# Altium PCB PCB.PcbDoc
Units mm, origin at the board's own origin, x right, y up, seen from the top; angles counter-clockwise.
Board outline 96 x 29 mm, 2 copper layers (Top Layer, Bottom Layer); 43 components, 25 nets, 160 pads, 27 vias.
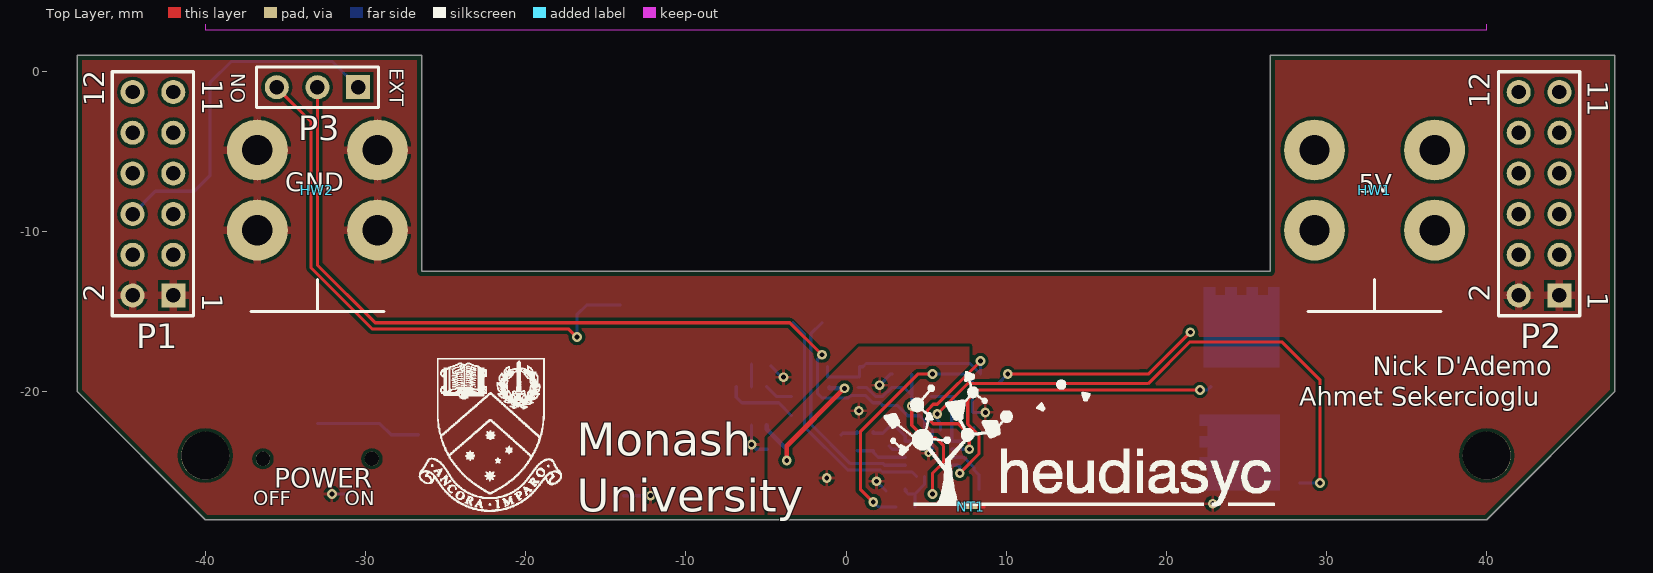
[diagram p0: Top Layer view]
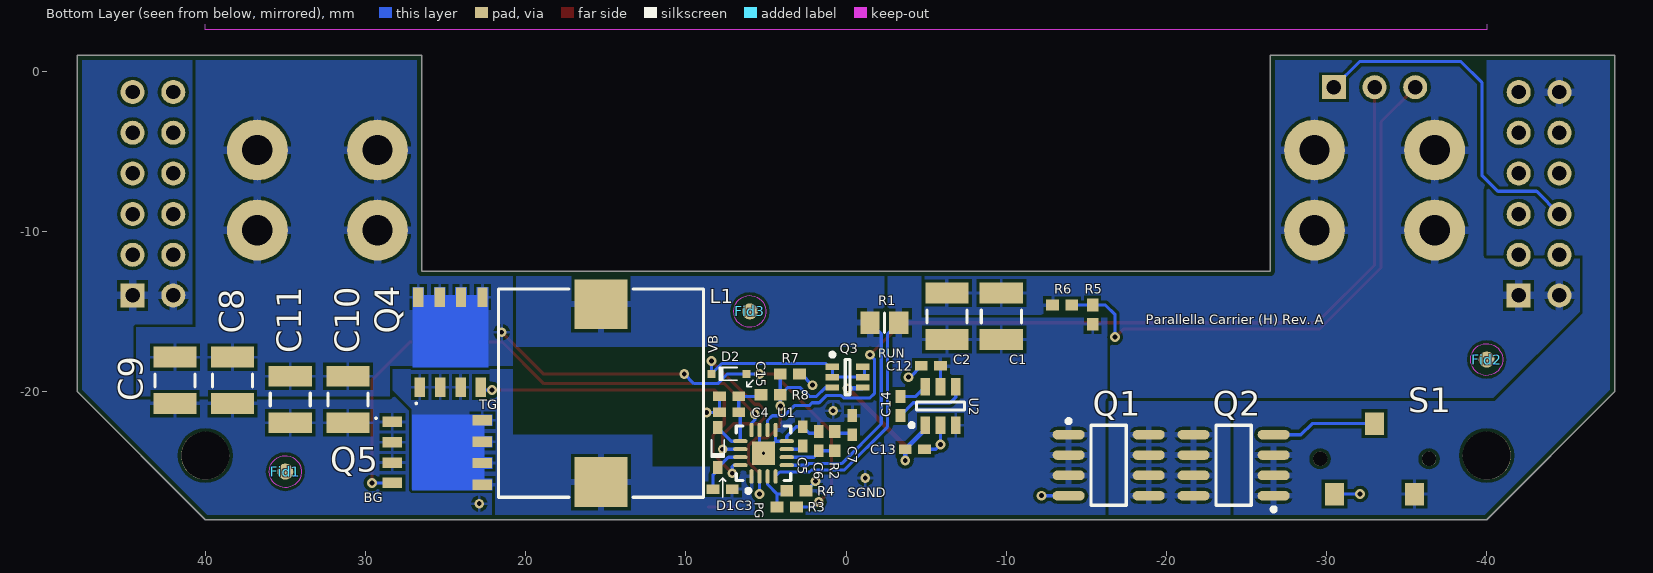
[diagram p1: Bottom Layer view, seen from below]
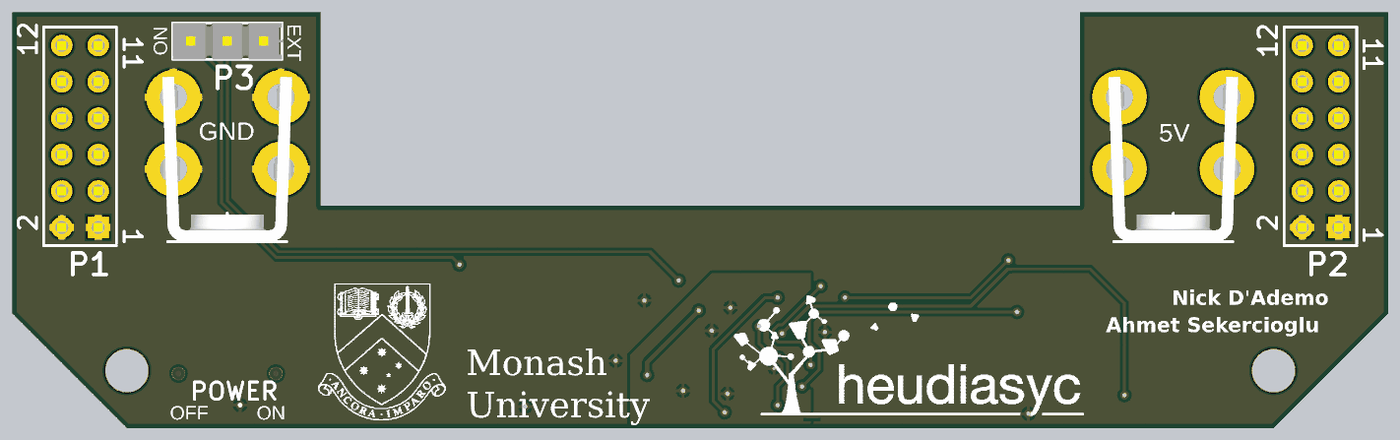
[diagram p2: 3D render of the assembled board from above, using the file's embedded part models]

## Layer stack, top to bottom
Top Solder: solder mask 0.0102, Solder Resist, Dk 3.5
Top Layer: signal copper 0.0356
Dielectric 1: dielectric 0.32, FR-4, Dk 4.8
Bottom Layer: signal copper 0.0356
Bottom Solder: solder mask 0.0102, Solder Resist, Dk 3.5

## Board outline
-48,-20 -40,-28 40,-28 48,-20 48,1 41.6,1 26.5,1 26.5,-12.5 -26.5,-12.5 -26.5,1 -48,1

## Design rules (kind name [scope] priority, off if disabled: settings)
BoardOutlineClearance [IsPolygon] p1: gap=0.3
Clearance [All] p1: gap=0.2
HoleSize [All] p1: absolutevalues=TRUE maxlimit=3 minlimit=0.025 maxpercent=80.000 minpercent=20.000
MinimumSolderMaskSliver [All] p1: minsoldermaskwidth=0
PolygonConnect PolygonConnect_GND [InNet('GND') And (InComponent('P1') Or InComponent('P2') Or InComponent('HW2')) vs InNet('GND')] p1: connectstyle=Relief reliefconductorwidth=0.5 reliefentries=4 polygonreliefangle="90 Angle" airgapwidth=0.2
PolygonConnect PolygonConnect_VBAT [InNet('VBAT') And (InComponent('P1')) vs InNet('VBAT')] p2: connectstyle=Relief reliefconductorwidth=0.5 reliefentries=4 polygonreliefangle="90 Angle" airgapwidth=0.2
PolygonConnect PolygonConnect_5V [InNet('5V') And (InComponent('HW1')) vs InNet('5V')] p3: connectstyle=Relief reliefconductorwidth=0.5 reliefentries=4 polygonreliefangle="90 Angle" airgapwidth=0.2
PolygonConnect PolygonConnect_Q1 [InComponent('Q1')] p4: connectstyle=Relief reliefconductorwidth=0.4 reliefentries=4 polygonreliefangle="90 Angle" airgapwidth=0.2
PolygonConnect PolygonConnect_Q2 [InComponent('Q2')] p5: connectstyle=Relief reliefconductorwidth=0.4 reliefentries=4 polygonreliefangle="90 Angle" airgapwidth=0.2
PolygonConnect PolygonConnect_L1 [InComponent('L1')] p6: connectstyle=Relief reliefconductorwidth=0.4 reliefentries=4 polygonreliefangle="90 Angle" airgapwidth=0.2
PolygonConnect PolygonConnect_R1 [InComponent('R1')] p7: connectstyle=Relief reliefconductorwidth=0.4 reliefentries=4 polygonreliefangle="90 Angle" airgapwidth=0.2
PolygonConnect [All] p8: connectstyle=Relief reliefconductorwidth=0.2 reliefentries=4 polygonreliefangle="90 Angle" airgapwidth=0.2
RoutingVias [All] p1: holewidth=0.711 width=1.27 viastyle="Through Hole" minholewidth=0.711 minwidth=1.27 maxholewidth=0.711 maxwidth=1.27
SilkToSilkClearance [All] p1: silktosilkclearance=0
SilkToSolderMaskClearance [IsPad] p1: minsilkscreentomaskgap=0.1 clearancetoexposedcopper=TRUE
SolderMaskExpansion [All] p1: expansion=0.102
Width [All] p1: maxlimit=1 minlimit=0.2 preferedwidth=0.2
26 further rules are at their usual default settings.

## Components (designator, comment, footprint, x,y, rotation, side; value= is the part's Value field where it differs from the comment)
C1 "Cap" CAPC3225N -9.7,-15.3 r90 bottom
C2 "Cap" CAPC3225N -6.3,-15.3 r90 bottom
C3 "Cap" CAPC1005N 7.7,-26.1 r0 bottom
C4 "Cap" CAPC1005N 7.3,-21.3 r0 bottom
C5 "Cap" CAPC1005N 2.7,-22.8 r270 bottom
C6 "Cap" CAPC1005N 1.7,-23.1 r90 bottom
C7 "Cap" CAPC1005N -0.4,-22.1 r90 bottom
C8 "Cap" CAPC3225N 38.3,-19.3 r270 bottom
C9 "Cap" CAPC3225N 41.9,-19.3 r270 bottom
C10 "Cap" CAPC3225N 31.1,-20.5 r270 bottom
C11 "Cap" CAPC3225N 34.7,-20.5 r270 bottom
C12 "Cap" CAPC1005N -5.3,-18.4 r0 bottom
C13 "Cap" CAPC1005N -4.3,-23.6 r180 bottom
C14 "Cap" CAPC1005N -3.4,-20.9 r270 bottom
C15 "Cap" CAPC1005N 7.3,-20.3 r0 bottom
D1 "BAS140WE6327HTSA1" SOD323 8,-23.5 r90 bottom
D2 "PMEG2005EJ,115" SOD323F 7.3,-18.9 r180 bottom
Fid1 "Fiducial mark" Fiducial_BOTTOM 35,-25 r90 top locked
Fid2 "Fiducial mark" Fiducial_BOTTOM -40,-18 r90 top locked
Fid3 "Fiducial mark" Fiducial_BOTTOM 6,-15 r90 top locked
HW1 "7790" 7790 33,-15 r90 top locked
HW2 "7790" 7790 -33,-15 r90 top locked
L1 "SRP1238A-R68M" SRP1238A 15.3,-20.1 r90 bottom
NT1 "NETTIE1" NETTIE1 7.8,-27.2 r0 top net-tie
P1 "Header 6X2" TSW-106-05-G-D -42,-14 r90 top locked
P2 "Header 6X2" TSW-106-05-G-D 44.54,-14 r90 top locked
P3 "" TSW-103-05-T-S -30.46,-1 r180 top
Q1 "SI4427BDY" SOIC127P600-8AN -16.4,-24.6 r180 bottom
Q2 "SI4427BDY" SOIC127P600-8AN -24.2,-24.6 r0 bottom
Q3 "Si1499DH" SOT363-6N -0.1,-19.1 r180 bottom
Q4 "BSC046N02KS G" INF-PG-TDSON-8-1_V 24.7,-16.9 r180 bottom
Q5 "BSC046N02KS G" INF-PG-TDSON-8-1_V 25.5,-23.8 r270 bottom
R1 "Res1" RESC2012N -2.4,-15.7 r180 bottom
R2 "Res1" RESC1005N 0.7,-23.1 r270 bottom
R3 "Res1" RESC1005N 3.7,-27.2 r0 bottom
R4 "Res1" RESC1005N 3.1,-26.2 r180 bottom
R5 "Res1" RESC1005N -15.4,-15.2 r90 bottom
R6 "Res1" RESC1005N -13.5,-14.6 r0 bottom
R7 "Res1" RESC1005N 3.5,-18.9 r180 bottom
R8 "Res1" RESC1005N 4.7,-20.2 r180 bottom
S1 "SPDT" CL-SB-12B-11T -33,-24.2 r180 bottom
U1 "LTC3786EUD#PBF" LT-UD-16_N 5.15,-23.85 r90 bottom
U2 "LTC1754ES6-5#TRMPBF" LT-S6-6-SOT-23_N -5.9,-20.9 r90 bottom

## Footprints (in the part's own frame and the unit in brackets; to place one, negate y for a bottom-side part, rotate by r counter-clockwise, add the part's x,y. Pads: shape width x height; smd on the part's side, far side on the other; paste and mask are expansions set on the pad)
7790 [mm]
  round 3.8 hole 1.9: 0(5.08,-3.75) 0(5.08,3.75) 0(10.08,-3.75) 0(10.08,3.75)
  silkscreen extent 0,-4.15 2,4.15, body extent 0,-4.83 11.51,4.83, height 7.92
CAPC1005N [mm] "Chip Capacitor, Body 1.0x0.5mm, IPC Medium Density"
  rect 0.8x0.6 smd: 1(-0.6,0) 2(0.6,0)
  body extent -0.55,-0.3 0.55,0.3, height 0.6
CAPC3225N [mm] "Chip Capacitor, Body 3.2x2.5mm, IPC Medium Density"
  rect 1.3x2.7 smd: 1(-1.45,0) 2(1.45,0)
  silkscreen extent -0.4,-1.25 0.4,1.25, body extent -1.7,-1.35 1.7,1.35, height 1.35
CL-SB-12B-11T [mm]
  round 0.9 hole 0.9 paste+0 mask+0: 0(-3.4,0) 0(3.4,0)
  rect 1.2x1.4 smd: 1(-2.5,-2.2) 2(0,2.2) 3(2.5,-2.2)
  body extent -4.25,-3.75 4.25,2.5, height 3.21
Fiducial_BOTTOM [mm]
  round 1 smd far side paste-10 mask+0.5: 0(0,0)
  Bottom Layer keep-out circle w0.01: c0,0 r1
INF-PG-TDSON-8-1_V [mm] "TDSON, 8-Leads, Body 6.15x5.15mm, Pitch 1.27mm"
  rect 0.65x1.2 smd: 1(-1.905,-2.825) 2(-0.635,-2.825) 3(0.635,-2.825) 4(1.905,-2.825) 5(2.007,2.794) 6(0.66,2.794) 7(-0.66,2.794) 8(-2.007,2.794)
  Top Layer region: 0.315,2.925 1.015,2.925 1.015,3.425 0.315,3.425
  Top Layer region: -1.015,2.925 -0.315,2.925 -0.315,3.425 -1.015,3.425
  Top Layer region: 1.65,2.925 2.35,2.925 2.35,3.425 1.65,3.425
  Top Layer region: -2.35,2.925 -1.65,2.925 -1.65,3.425 -2.35,3.425
  Top Layer region: -2.35,2.925 -2.35,-1.575 2.35,-1.575 2.35,2.925
  silkscreen extent -2.23,-3.94 -2.03,-3.74, body extent -2.58,-3.08 2.58,3.08, height 1
LT-S6-6-SOT-23_N [mm] "SOT23, 6-Leads, Body 3x1.75mm, Pitch 0.95mm, IPC Medium Density"
  rect 1.1x0.6 smd: 1(-1.2,0.95) 2(-1.2,0) 3(-1.2,-0.95) 4(1.2,-0.95) 5(1.2,0) 6(1.2,0.95)
  silkscreen extent -1.32,-1.5 0.25,1.93, body extent -0.87,-1.5 0.87,1.5, height 1.45
LT-UD-16_N [mm] "QFN, 16-Leads, Body 3x3mm, Pitch 0.5mm, Thermal Pad 1.45x1.45mm, IPC Medium Density"
  oval 0.9x0.25 smd: 1(-1.45,0.75) 2(-1.45,0.25) 3(-1.45,-0.25) 4(-1.45,-0.75) 9(1.45,-0.75) 10(1.45,-0.25) 11(1.45,0.25) 12(1.45,0.75)
  oval 0.25x0.9 smd: 5(-0.75,-1.45) 6(-0.25,-1.45) 7(0.25,-1.45) 8(0.75,-1.45) 13(0.75,1.45) 14(0.25,1.45) 15(-0.25,1.45) 16(-0.75,1.45)
  rect 1.45x1.45 smd: 17(0,0)
  silkscreen extent -2.47,-1.7 1.7,1.7, body extent -1.55,-1.55 1.55,1.55, height 0.8
NETTIE1 [mm]
  rect 0.4x0.254 smd paste-1 mask+0: 1(-0.2,0) 2(0.2,0)
RESC1005N [mm] "Chip Resistor, Body 1.1x0.5mm, IPC Medium Density"
  rect 0.8x0.7 smd: 1(-0.6,0) 2(0.6,0)
  body extent -0.55,-0.3 0.55,0.3, height 0.4
RESC2012N [mm] "Chip Resistor, Body 2.0x1.3mm, IPC Medium Density"
  rect 1.2x1.4 smd: 1(-0.9,0) 2(0.9,0)
  silkscreen extent 0,-0.6 0,0.6, body extent -1.07,-0.7 1.07,0.7, height 0.65
SOD323 [mm]
  rect 0.8x0.6 smd: 1(1.25,0) 2(-1.25,0)
  silkscreen extent -0.6,-0.4 0.5,0.4, body extent -0.85,-0.63 0.85,0.63, height 0.9
SOD323F [mm]
  rect 0.5x0.5 smd: 1(1.1,0) 2(-1.1,0)
  silkscreen extent -0.6,-0.4 0.5,0.4, body extent -0.9,-0.68 0.9,0.67, height 0.8
SOIC127P600-8AN [mm] "SOIC, 8-Leads, Body 4.9x3.9mm, Pitch 1.27mm, IPC Medium Density"
  oval 2x0.6 smd: 1(-2.5,1.905) 2(-2.5,0.635) 3(-2.5,-0.635) 4(-2.5,-1.905) 5(2.5,-1.905) 6(2.5,-0.635) 7(2.5,0.635) 8(2.5,1.905)
  silkscreen extent -2.63,-2.5 1.1,2.88, body extent -2,-2.5 2,2.5, height 2.72
SOT363-6N [mm] "SOT363, 6-Leads, Body 2x1.3mm, Pitch 0.65mm, Lead Span 2.1mm, IPC Medium Density"
  rect 0.85x0.4 smd: 1(-0.95,0.65) 2(-0.95,0) 3(-0.95,-0.65) 4(0.95,-0.65) 5(0.95,0) 6(0.95,0.65)
  silkscreen extent -1.07,-1.1 0.15,1.52, body extent -0.7,-1.1 0.7,1.1, height 1
SRP1238A [mm]
  rect 3.1x3.3 smd: 1(-5.55,0) 2(5.55,0)
  silkscreen extent -6.5,-6.4 6.5,6.4, body extent -6.35,-6.25 6.35,6.25, height 3.3
TSW-103-05-T-S [mm]
  rect 1.5x1.5 hole 0.9: 1(0,0)
  round 1.5 hole 0.9: 2(2.54,0) 3(5.08,0)
  silkscreen extent -1.27,-1.27 6.35,1.27, body extent -1.4,-1.27 6.35,1.27, height 5.85
TSW-106-05-G-D [mm]
  rect 1.5x1.5 hole 0.9: 1(0,0)
  round 1.5 hole 0.9: 2(0,2.54) 3(2.54,0) 4(2.54,2.54) 5(5.08,0) 6(5.08,2.54) 7(7.62,0) 8(7.62,2.54) 9(10.16,0) 10(10.16,2.54) 11(12.7,0) 12(12.7,2.54)
  silkscreen extent -1.27,-1.27 13.97,3.81, body extent -1.27,-1.27 13.97,3.81, height 5.21

## Part data
C1 C2 C8 C9 C10 C11: "MURATA - GRM32ER71A476KE15L - CAP CER 47UF 10V X7R 1210"
C3 C5: "TDK - C1005X7R1C104K050BC - CAP CER 0.1UF 16V X7R 0402"
C4: "TDK - C1005X5R1A475K050BC - CAP CER 4.7UF 10V X5R 0402"
C6: "KEMET - C0402C101J5GACTU -  CAP CER 100PF 50V NP0 0402"
C7: "MURATA - GRM155R71E682KA01D - CAP CER 6800PF 25V X7R 0402"
C12 C13: "TDK - C1005X5R0J106M050BC - CAP CER 10UF 6.3V X5R 0402"
C14 C15: "MURATA - GRM155R61A105KE15D - CAP CER 1UF 10V X5R 0402"
D1: library part "D Schottky", "INFINEON TECHNOLOGIES - BAS140WE6327HTSA1 - DIODE SCHOTTKY 40V 120MA SOD323"
D2: library part "D Schottky", "NXP SEMICONDUCTORS - PMEG2005EJ,115 - DIODE SCHOTTKY 20V 500MA SOD323F"
Fid1 Fid2 Fid3: "Fiducial Mark"
HW1 HW2: "KEYSTONE ELECTRONICS - 7790 - TERM PCB SNAP-IN HORZ M3 THREAD"
L1: library part Inductor, "BOURNS INC - SRP1238A-R68M - FIXED IND 680NH 28A 2.5 MOHM SMD"
P1 P2: "SAMTEC - TSW-106-05-G-D - 12 Positions Header, Unshrouded Connector 0.100\" (2.54mm) Through Hole Gold"
P3: library part "Header 3", "SAMTEC - TSW-103-05-T-S - 3 Positions Header, Unshrouded Connector 0.100\" (2.54mm) Through Hole Tin"
Q1 Q2: "VISHAY SILICONIX - SI4427BDY-T1-E3 - MOSFET P-CH 30V 9.7A 8-SOIC"
Q3: "VISHAY SILICONIX - SI1499DH-T1-E3 - MOSFET P-CH 8V 1.6A SC70-6"
Q4 Q5: "INFINEON - BSC046N02KS G - N-Channel OptiMOS 2 Power-Transistor, 20 V VDS, 80 A ID, -55 to 150 degC, PG-TDSON-8-1, Reel, Green"
R1: "VISHAY DALE - WSLP08056L000FEA18 - RES SMD 0.006 OHM 1% 1W 0805"
R2: "PANASONIC - ERJ-2RKF5111X - RES SMD 5.11K OHM 1% 1/10W 0402"
R3: "PANASONIC - ERJ-2RKF4753X - RES SMD 475K OHM 1% 1/10W 0402"
R4: "PANASONIC - ERJ-2RKF1503X - RES SMD 150K OHM 1% 1/10W 0402"
R5 R8: "PANASONIC - ERJ-2RKF1003X - RES SMD 100K OHM 1% 1/10W 0402"
R6: "Resistor"
R7: "PANASONIC - ERJ-2RKF1004X - RES SMD 1M OHM 1% 1/10W 0402"
S1: library part CL-SB-12B-01T, "COPAL ELECTRONICS INC - CL-SB-12B-11T - SWITCH SLIDE SPDT 200MA 12V"
U1: "LINEAR TECH - LTC3786EUD#PBF - Sync Boost Controller, Low 55 uA IQ, 16-pin QFN (UD-16), -40 to 125 degC, Pb-Free"
U2: "LINEAR TECH - LTC1754ES6-5#TRMPBF - Micropower, Regulated Charge Pump with Shutdown, 2.7 to 5.5 V Vin, 5 V Vout, 6-pin SOT23 (S6-6), -40 to 85 degC, Pb-Free, Mini Tape and Reel"

## Free pads (board coordinates)
  round 3 hole 3: 0(-40,-24) 0(40,-24)

## Via types
v1: diameter 0.61, hole 0.305, Top Layer to Bottom Layer, tented both sides, 20 vias
v2: diameter 0.61, hole 0.305, Top Layer to Bottom Layer, tented top, 6 vias
v3: diameter 0.5, hole 0.2, Top Layer to Bottom Layer, tented top, 1 vias

## Nets (pads, with @x,y where several pads share a name; then routed paths per layer and width w, separated by ;. In a path a pad name is that pad's centre, name@x,y a point inside that pad or via, vN(x,y) a via of type N, cw(c..) or ccw(c..) an arc to the next point about the centre after c; other vN are vias at no path point)
5V: C8.1 C9.1 C10.1 C11.1 D2.1 HW1.0 Q4.5 Q4.6 Q4.7 Q4.8 R3.1 | length 29.9
  Top Layer w0.2: v1(1.7,-26.9) 0.9,-26.1 0.9,-22.5 4.5,-18.9 v1(5.4,-18.9) ; v1(10.1,-18.9) 18.3,-18.9 18.9,-18.9 v1(21.5,-16.3)
  Bottom Layer w0.2: v1(1.7,-26.9) 2,-27.2 R3.1 ; v1(5.4,-18.9) D2.1 7.4,-18.9 8.005,-19.505 9.495,-19.505 v1(10.1,-18.9)
BG: Q5.4 U1.12 | length 35.5
  Top Layer w0.2: v1(5.7,-21.4) 7.6,-19.5 8.944,-19.5 8.949,-19.505 18.861,-19.505 21.461,-16.905 21.751,-16.905 21.756,-16.9 27.2,-16.9 29.6,-19.3 v2@29.6,-25.7
  Bottom Layer w0.2: v1(5.7,-21.4) 5.7,-21.774 5.9,-21.974 U1.12 ; Q5.4 v2(29.6,-25.705)
EXT_RUN: P1.6 P3.1 | length 22.1
  Bottom Layer w0.2: P1.6 -43.12,-7.5 -40.7,-7.5 -39.7,-6.5 -39.7,-0.7 -38.4,0.6 -32.06,0.6 P3.1
GND: C1.2 C2.2 C4.2 C8.2 C9.2 C10.2 C11.2 C12.2 C13.2 C15.2 HW2.0 NT1.2 P1.1 P1.2 P2.1 P2.2 Q1.4 Q5.1 Q5.2 Q5.3 R6.2 S1.1 U2.2 | length 9.1
  Top Layer w0.2: NT1.2 8.6,-27.2
  Bottom Layer w0.2: v1(-32.1,-26.4) S1.1 ; Q1.4 -12.205,-26.505 v1(-12.2,-26.5) ; U2.2 v1(-5.9,-23.3) -5.6,-23.6 C13.2 ; C12.2 -4,-19.1 v1(-3.9,-19.1) ; C15.2 C4.2 v1(8.7,-21.3)
  other v1: 22.9,-27
INTVCC: C4.1 C15.1 D1.1 R8.1 U1.13 | length 6
  Bottom Layer w0.2: R8.1@5.3,-20.3 C15.1 C4.1 6.6,-21.4 U1.13 7.156,-23.1 8,-22.256 D1.1
NetC3_1: C3.1 L1.1 Q4.1 Q4.2 Q4.3 Q5.5 Q5.6 Q5.7 Q5.8 U1.1
NetC3_2: C3.2 D1.2 U1.15 | length 3.1
  Bottom Layer w0.2: U1.15 7.344,-24.1 7.994,-24.75 D1.2 8,-24.9 8.3,-25.2 C3.2
NetC5_2: C5.2 U1.7 | length 1.1
  Bottom Layer w0.2: C5.2 2.9,-23.6 U1.7
NetC6_1: C6.1 R2.2 U1.6 | length 3.1
  Bottom Layer w0.2: R2.2 C6.1 ; C6.1@1.7,-23.8 2,-24.1 U1.6
NetC7_1: C7.1 R2.1 | length 1.1
  Bottom Layer w0.2: C7.1@-0.3,-22.7 -0.2,-22.6 0.7,-22.6 R2.1
NetC13_1: C13.1 Q3.4 U2.1 | length 9.7
  Top Layer w0.3: v1(-3.7,-24.3) -3.7,-23.4 v1(-0.1,-19.8)
  Bottom Layer w0.3: U2.1 -4.95,-22.35 C13.1 v1(-3.7,-24.3) ; Q3.4 -1,-19.8 v1(-0.1,-19.8)
NetC14_1: C14.1 U2.6 | length 1.8
  Bottom Layer w0.2: U2.6 -4.35,-20.3 C14.1
NetC14_2: C14.2 U2.4 | length 4.6
  Bottom Layer w0.2: U2.4 -6.85,-20.35 -6.5,-20.7 -4.2,-20.7 C14.2
NetP3_3: P3.3 R5.2 R6.1 | length 34.9
  Top Layer w0.2: P3.3 -35.54,-1.025 -33.4,-3.165 -33.4,-12.266 -29.566,-16.1 -17.3,-16.1 v1(-16.8,-16.6)
  Bottom Layer w0.2: v1(-16.8,-16.6) -16.8,-15.2 -16.2,-14.6 R5.2 R6.1
NetQ1_5: Q1.5 Q1.6 Q1.7 Q1.8 Q2.5 Q2.6 Q2.7 Q2.8
NetQ2_4: Q2.4 S1.2 | length 6.6
  Bottom Layer w0.2: S1.2 -29.1,-22 -28.405,-22.695 Q2.4
NetR3_2: R3.2 R4.1 U1.3 | length 2.9
  Bottom Layer w0.2: R4.1 3.9,-26.4 4.3,-26.4 ; R4.1@3.7,-26.1 R4.1@3.75,-26.15 ; R3.2 4.3,-26.4 ; U1.3 4.9,-25.8 4.3,-26.4
PGOOD: Q3.3 R7.1 R8.2 U1.2 | length 14
  Top Layer w0.2: v1(4.1,-20.9) 4.1,-22.1 4.9,-22.9 5.6,-22.9 6.094,-23.394 6.094,-24.406 5.4,-25.1 v2(5.4,-26.4)
  Bottom Layer w0.2: Q3.3@0.75,-19.75 Q3.3 1.294,-19.75 1.844,-20.3 2.29,-20.3 2.295,-20.305 2.85,-19.75 3.65,-19.75 R8.2 R7.1 ; v1(4.1,-20.9) R8.2@4.1,-20.3 ; v2(5.4,-26.4) U1.2
RUN: P3.2 U1.10 | length 55.5
  Top Layer w0.2: P3.2 -33,-12.1 -29.4,-15.7 -3.5,-15.7 v2(-1.5,-17.7)
  Bottom Layer w0.2: v2(-1.5,-17.7) -1.775,-17.975 -1.775,-20.125 -1.495,-20.405 0.151,-20.405 0.306,-20.25 1.229,-20.25 1.679,-20.7 2.124,-20.7 2.3,-20.876 3.22,-20.876 3.849,-21.505 4.595,-21.505 4.9,-21.81 U1.10
SENSE-: L1.2 R1.1 U1.5 | length 13.6
  Bottom Layer w0.2: R1.1 -2.2,-16.4 -2.2,-22.024 0.276,-24.5 2.321,-24.5 2.421,-24.6 U1.5
SGND: C5.1 C6.2 C7.2 NT1.1 R4.2 R7.2 U1.8 U1.9 U1.11 U1.17 | length 9.6
  Top Layer w0.2: 7,-27.2 NT1.1
  Bottom Layer w0.2: C6.2 1.7,-22.6 2.3,-22.6 C5.1 3.1,-22.2 3.7,-22.8 U1.8 4.4,-23.1 ; v1@1.9,-25.5 v1(1.9,-25.6) R4.2 ; v1@2.2,-19.6 v1(2.1,-19.6) 2.8,-18.9 R7.2 ; U1.9 4.4,-23.1 ; U1.11 5.4,-23.6 v3(5.15,-23.85) 4.4,-23.1
  other v1: 0.8,-21.2
  other v2: -1.2,-25.4
TG: Q4.4 U1.16 | length 21.9
  Top Layer w0.2: v1(7.1,-25.1) 8.305,-23.895 8.305,-22.739 7.6,-22.034 7.6,-20.5 8.195,-19.905 22.095,-19.905 v2(22.1,-19.9)
  Bottom Layer w0.2: U1.16 7,-24.6 7.1,-24.7 v1(7.1,-25.1) ; v2(22.1,-19.9) 22.57,-19.9 22.77,-19.7 Q4.4
VBAT: P1.12 Q2.1 Q2.2 Q2.3 S1.3
VBAT_SW: C1.1 C2.1 C12.1 Q1.1 Q1.2 Q1.3 R1.2 R5.1 U1.4 U2.3 U2.5 | length 16.5
  Bottom Layer w0.2: U2.5 C12.1@-5.9,-18.3 ; R1.2 -2.6,-16.4 -2.6,-22.19 0.11,-24.9 2.156,-24.9 2.281,-25.025 4.125,-25.025 U1.4
VBIAS: D2.2 Q3.1 Q3.2 Q3.5 Q3.6 U1.14 | length 22
  Top Layer w0.2: v1(7.7,-23.6) 7.7,-22.7 7.005,-22.005 5.449,-22.005 5.095,-21.651 5.095,-21.149 5.449,-20.795 5.705,-20.795 v2(8.4,-18.1)
  Bottom Layer w0.2: Q3.6@-1.15,-18.45 -1.15,-19.1 Q3.5 Q3.2@0.75,-19.1 ; Q3.2 Q3.1 1.05,-18.45 1.25,-18.25 7.75,-18.25 D2.2 v2(8.4,-18.1) ; U1.14 v1(7.7,-23.6)
pads on no net: Fid1.0 Fid2.0 Fid3.0 P1.3 P1.4 P1.5 P1.7 P1.8 P1.9 P1.10 P1.11 P2.3 P2.4 P2.5 P2.6 P2.7 P2.8 P2.9 P2.10 P2.11 P2.12 S1.0

## Polygon pours and split planes (outlines as drawn)
5V on Bottom Layer "5V" (solid, remove dead copper, pour order 4): 26.5,1 33.098,1 40.6,1 40.6,-10 40.6,-16 44.3,-16 44.3,-20.3 33.5,-20.3 28.5,-20.3 28.5,-18.4 20.8,-18.4 20.8,-12.5 26.5,-12.5
VBAT on Bottom Layer "Bottom Layer-VBAT" (solid, remove dead copper, pour order 0): -48,1 -40,1 -40,-11.5 -46,-11.5 -46,-15.1 -40.5,-20.6 -24.2,-20.6 -24.2,-22.2 -24.2,-28 -33.6,-28 -40,-28 -48,-20
NetQ1_5 on Bottom Layer "DRAIN-SW" (solid, remove dead copper, pour order 2): -23.996,-27.694 -16.4,-27.694 -16.4,-27.6 -16.4,-20.6 -23.996,-20.6 -23.996,-22.284
NetC3_1 on Bottom Layer "SW" (solid, remove dead copper, pour order 6): 20.8,-18.4 28.5,-18.4 28.5,-19.701 27.1,-21.099 27.1,-26.1 21.9,-26.1 21.9,-28 5.7,-28 5.7,-24.7 12.1,-24.7 12.1,-22.7 20.8,-22.7
GND on Bottom Layer "Bottom Layer-GND" (solid, remove dead copper, pour order 10): 26.5,1 41.6,1 48,1 48,-20 40,-28 22.1,-28 22.1,-12.5 26.5,-12.5
SENSE- on Bottom Layer "SENSE-" (solid, remove dead copper, pour order 14): -2.4,-12.5 -2.4,-17.204 20.8,-17.204 20.8,-12.5
VBAT_SW on Bottom Layer "VIN" (solid, remove dead copper, pour order 16): -2.4,-12.5 -2.4,-28 -16.4,-28 -16.3,-27.9 -16.3,-15.4 -4.7,-15.4 -4.7,-12.5
GND on Bottom Layer "BottomLayer-GND2" (solid, remove dead copper, pour order 18): -2.4,-12.5 -2.4,-28 -40,-28 -48,-20 -48,1 -26.5,1 -26.5,-12.5
SGND on Bottom Layer "BottomLayer-SGND" (solid, remove dead copper, pour order 20): -2.4,-20.4 4.5,-20.4 4.5,-27.7 4.494,-27.694 -2.4,-27.694 -2.4,-20.4
SGND on Top Layer "SGND" (solid, remove dead copper, pour order 8): -4.9,-22.9 -1.4,-19.4 0.8,-17.2 7.7,-17.2 7.7,-18.8 7.7,-27.7 -4.9,-27.7
GND on Top Layer "Top Layer-GND" (solid, remove dead copper, pour order 12): -48,1 -26.5,1 -26.5,-12.5 26.5,-12.5 26.5,1 41.6,1 48,1 48,-20 40,-28 -40,-28 -48,-20

## Keep-outs
Keep-Out Layer:
  rectangle: -40,2.6 40,38.6
  text "LCD" at -40.5,2.6 h1.52 r90

## Silkscreen, mask and mechanical layers (free items; w line width, h text height)
Top Overlay:
  drawing of 5606 lines, arcs and shapes, not listed
  text "EXT" at -28.8,0.2 h1.52 r270
  text "ON" at -37.2,-2 h1.52 r90
  text "GND" at -35,-7.9 h2
  text "5V" at 32,-8 h2
  text "Nick D'Ademo" at 32.9,-19.4 h2
  text "Ahmet Sekercioglu" at 28.31,-21.3 h2
  text "POWER" at -35.7,-26 h1.2
  text "OFF         ON" at -37,-27.4 h1.52
  text "Monash / University" at -16.8,-28.2 h3.5
Bottom Overlay:
  lines w0.1: 5.8,-19.3 6.2,-19.7 ; 5.9,-19.7 6.2,-19.7 ; 6.2,-19.4 6.2,-19.7 ; 7.5,-25.6 7.7,-25.4 ; 7.7,-26.6 7.7,-25.4 ; 7.9,-25.6 7.7,-25.4
  text "Parallella Carrier (H) Rev. A" at -18.7,-15.8 h0.6
  text "VB" at 8,-17.6 h0.6 r270
  text "RUN" at -2,-17.9 h0.54
  text "TG" at 22.9,-21.1 h0.6
  text "SGND" at -0.1,-26.6 h0.6
  text "PG" at 5.7,-26.9 h0.54 r90
  text "BG" at 30.1,-26.9 h0.6

## Text inside footprints (layer, text, board x,y; h text height)
P1: Top Overlay "12" at -46.3,-2.2 h1.27 r90; Top Overlay "11" at -40.2,-0.5 h1.27 r270; Top Overlay "1" at -40.2,-13.9 h1.27 r270; Top Overlay "2" at -46.3,-14.4 h1.27 r90
P2: Top Overlay "12" at 40.2,-2.3 h1.27 r90; Top Overlay "11" at 46.3,-0.6 h1.27 r270; Top Overlay "1" at 46.3,-13.8 h1.27 r270; Top Overlay "2" at 40.2,-14.4 h1.27 r90